# Altium PCB 飞控PCB.PcbDoc
Units mil, origin at the board's own origin, x right, y up, seen from the top; angles counter-clockwise.
Board outline 2440.03 x 1485.03 mil, 2 copper layers (Top Layer, Bottom Layer); 82 components, 56 nets, 290 pads, 107 vias.
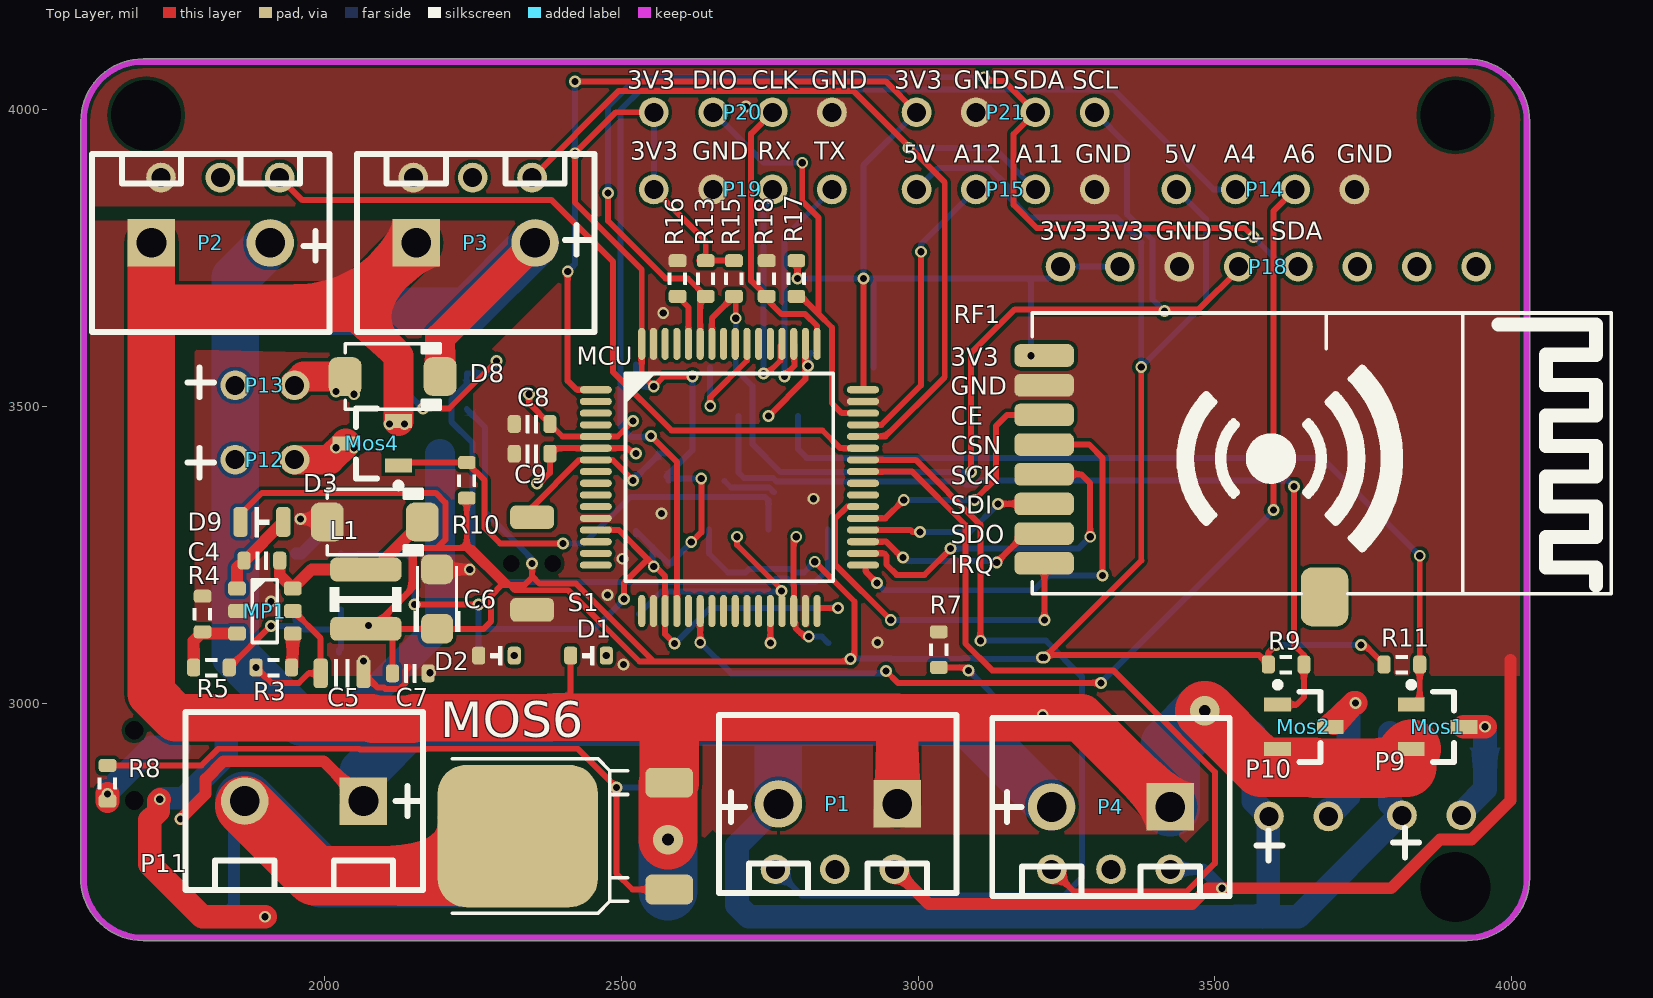
[diagram p0: Top Layer view]
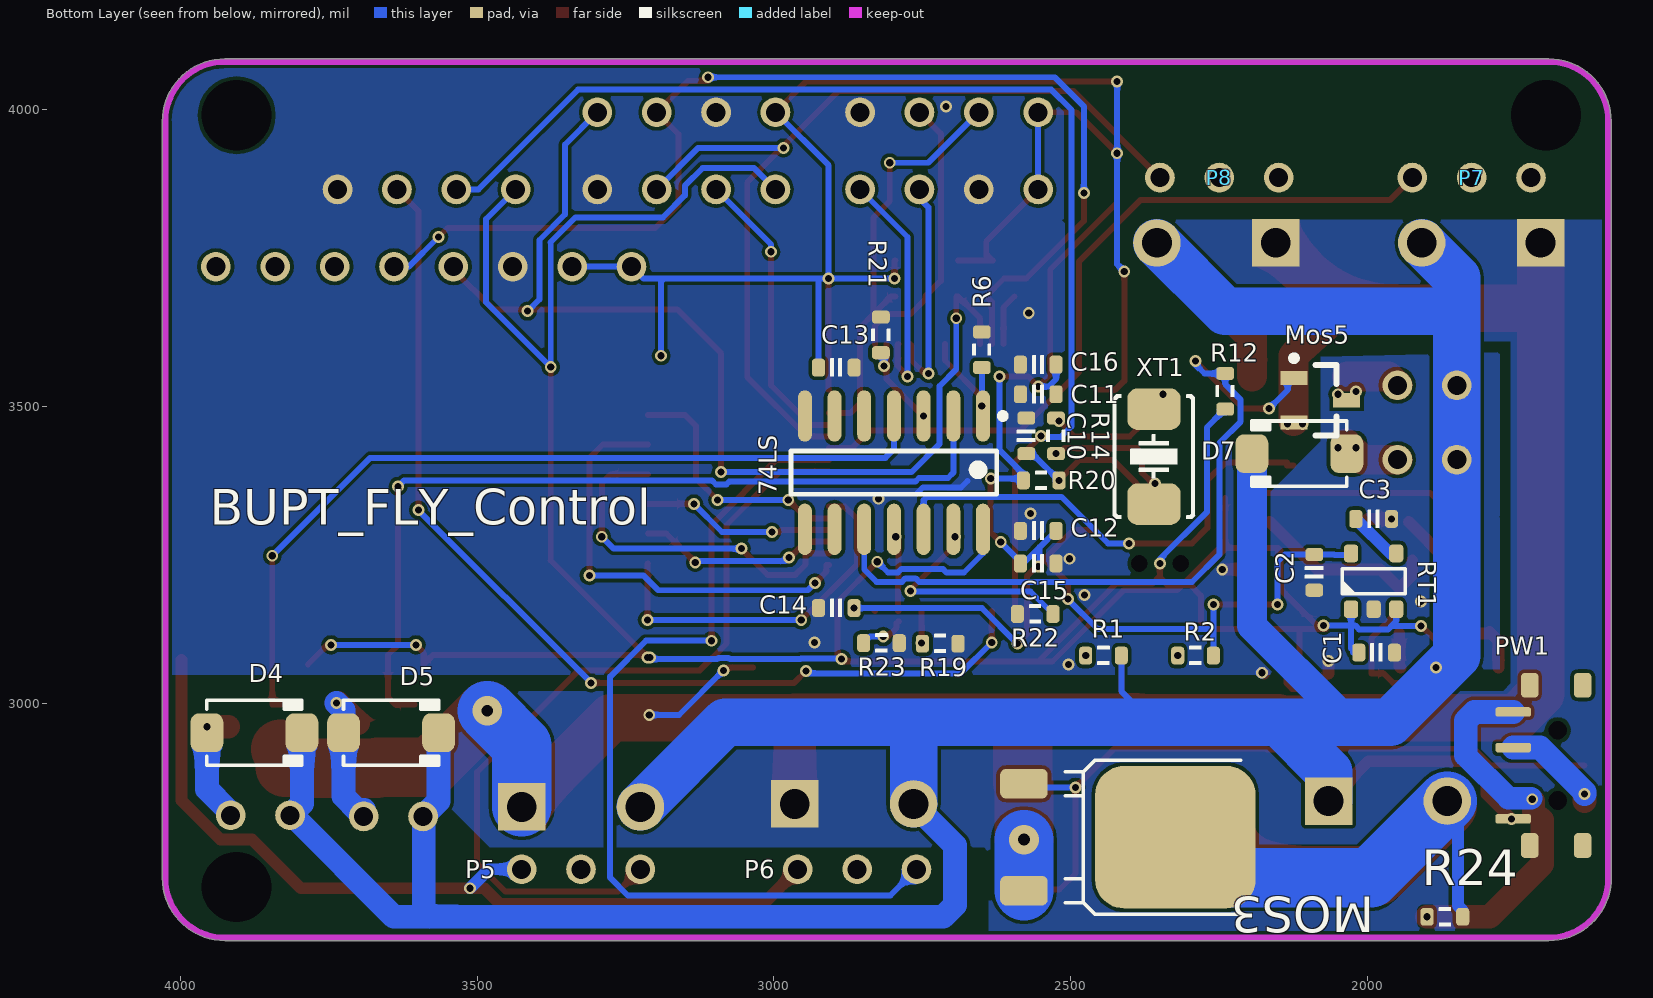
[diagram p1: Bottom Layer view, seen from below]
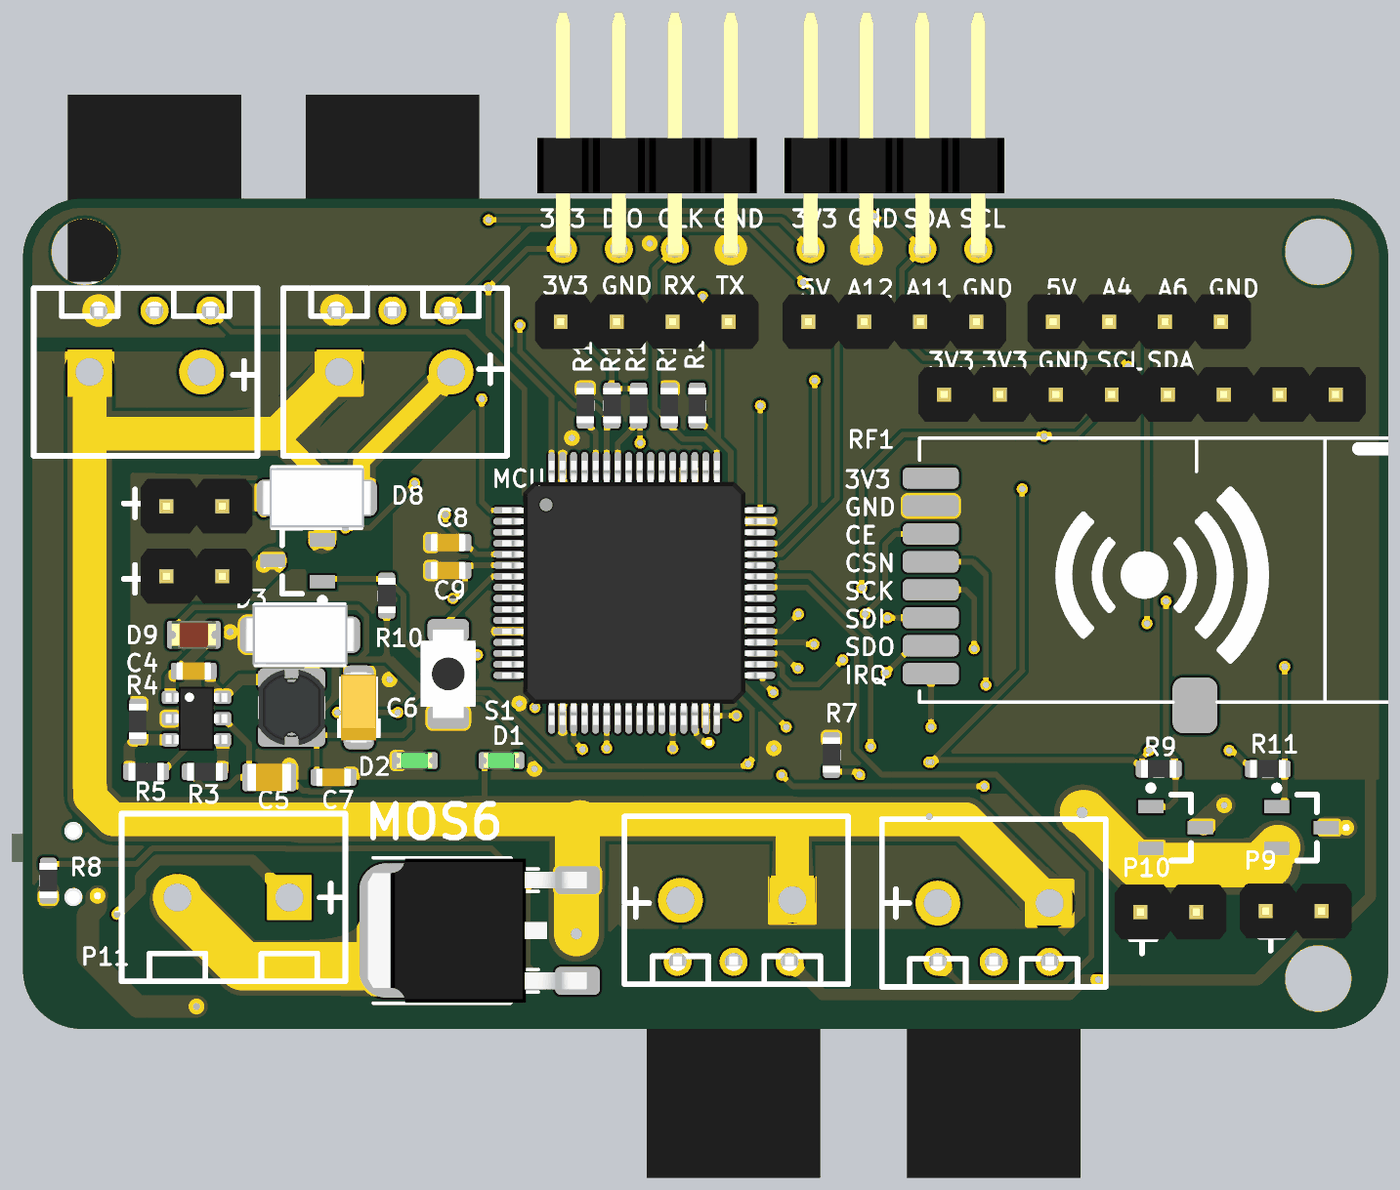
[diagram p2: 3D render of the assembled board from above, using the file's embedded part models]
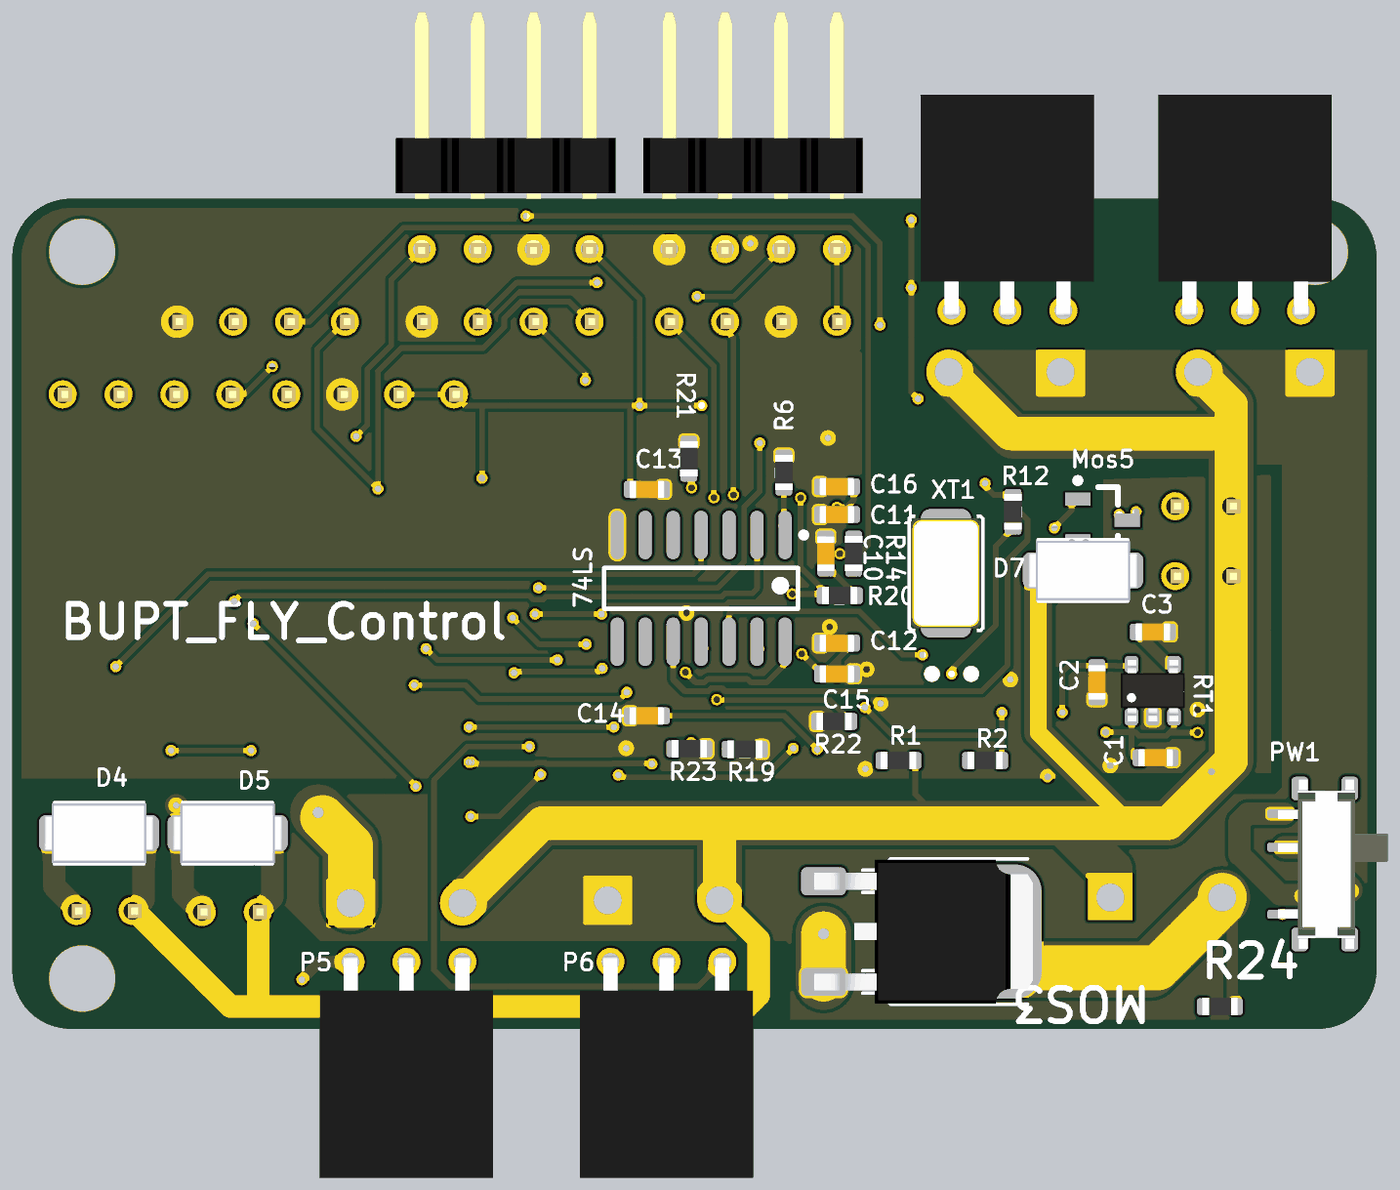
[diagram p3: 3D render of the assembled board from below, using the file's embedded part models]

## Layer stack, top to bottom
Top Solder: solder mask 0.4, Solder Resist, Dk 3.5
Top Layer: signal copper 1.4
Dielectric1: dielectric 12.6, FR-4, Dk 4.8
Bottom Layer: signal copper 1.4
Bottom Solder: solder mask 0.4, Solder Resist, Dk 3.5

## Board outline
1590.18,2698.62 cw(c1595,2700) 1589.98,2700 1589.98,3980 cw(c1695,3980) 1695,4085.01 3925,4085.01 cw(c3925,3980) 4030.01,3980 4030.01,2705 cw(c3925,2705) 3925,2599.99 1695,2599.99 cw(c1695,2705)

## Design rules (kind name [scope] priority, off if disabled: settings)
Clearance [All] p1: gap=6 ignorepadtopadclearanceinfootprint=FALSE except(0: Arc-Hole Track-Hole SMDPad-Hole THPad-Hole Via-Hole Fill-Hole Poly-Hole Region-Hole Text-Hole)
PolygonConnect [All] p1: connectstyle=Direct reliefconductorwidth=10 reliefentries=4 polygonreliefangle="90 Angle" airgapwidth=10
RoutingVias [All] p1: holewidth=12 width=20 viastyle="Through Hole" minholewidth=12 minwidth=20 maxholewidth=100 maxwidth=50
SilkToSilkClearance [All] p1: silktosilkclearance=6
SilkToSolderMaskClearance [IsPad] p1: minsilkscreentomaskgap=6 clearancetoexposedcopper=TRUE
SolderMaskExpansion [All] p1: expansion=4
Width [All] p1: maxlimit=100 minlimit=6 preferedwidth=10 minimp=50.000000 maximp=50.000000 favimp=50.000000
28 further rules are at their usual default settings.

## Classes and differential pairs
component class 飞控: 74LS C8 C9 C10 C11 C12 C13 C14 C15 C16 CC1 MCU MPU1 P14 P15 P18 P19 P20 P21 R6 R9 R10 R11 R12 R13 R14 R15 R16 R17 R18 R19 R20 R21 R22 R23 RF1 S1 XT1
component class 接口: C1 C2 C3 C4 C5 C6 C7 D1 D2 D3 D4 D5 D7 D8 D9 L1 Mos1 Mos2 MOS3 Mos4 Mos5 MOS6 MP1 P1 P2 P3 P4 P5 P6 P7 P8 P9 P10 P12 P13 R1 R2 R3 R4 R5 R7 R8 R24 RT1

## Components (designator, comment, footprint, x,y, rotation, side; value= is the part's Value field where it differs from the comment)
74LS "74LS07" SOP14 2800,3390 r270 bottom
C1 "Cap_0603" CAP_0603 1985,3085 r0 bottom
C2 "Cap_0603" CAP_0603 2090,3220 r90 bottom
C3 "Cap_0603" CAP_0603 1990,3310 r0 bottom
C4 "Cap_0603" CAP_0603 1895,3240 r180 top
C5 "Cap_0805" CAP_0805 2030,3050 r180 top
C6 "Cap_Tan_1206" CAP_TAN_A1206 2190,3175 r90 top
C7 "Cap_0603" CAP_0603 2145,3050 r180 top
C8 "Cap_0603" CAP_0603 2350,3470 r0 top
C9 "Cap_0603" CAP_0603 2350,3420 r0 top
C10 "Cap_0603" CAP_0603 2575,3450 r270 bottom
C11 "Cap_0603" CAP_0603 2555,3520 r180 bottom
C12 "Cap_0603" CAP_0603 2555,3290 r180 bottom
C13 "Cap_0603" CAP_0603 2895,3565 r0 bottom
C14 "Cap_0603" CAP_0603 2895,3160 r180 bottom
C15 "Cap_0603" CAP_0603 2555,3235 r0 bottom
C16 "Cap_0603" CAP_0603 2555,3570 r180 bottom
D1 "LED_0603" LED_0603_GREEN 2445,3080 r180 top
D2 "LED_0603" LED_0603_GREEN 2290,3080 r180 top
D3 "Diode_SMA" DO-214AC 2085,3305 r0 top
D4 "Diode_SMA" DO-214AC 3875,2950 r180 bottom
D5 "Diode_SMA" DO-214AC 3645,2950 r180 bottom
D7 "Diode_SMA" DO-214AC 2115,3420 r0 bottom
D8 "Diode_SMA" DO-214AC 2115,3550 r0 top
D9 "Diode" LED_0805_RED 1895,3305 r0 top
L1 "Ind_CD32" IND_CD32 2070,3175 r270 top
MCU "STM32F103RC" LQFP_P0.5_64 2682.36,3380 r0 top
Mos1 "MOSFET N" Nmos_SOT23 3875,2960 r0 top
Mos2 "MOSFET N" Nmos_SOT23 3650,2960 r0 top
MOS3 "MOSFET_N" TO-252AA 2579,2864 r270 bottom
Mos4 "MOSFET N" Nmos_SOT23 2080.71,3437.4 r180 top
Mos5 "MOSFET N" Nmos_SOT23 2080,3510 r180 bottom
MOS6 "MOSFET_N" TO-252AA 2581,2686 r90 top
MP1 "MP2359" SOT23-6 1900,3155 r0 top
P1 "HDR1x2_2.54" "Green_Header 2" 2964,2830 r0 top
P2 "HDR1x2_2.54" "Green_Header 2" 1710,3775 r180 top
P3 "HDR1x2_2.54" "Green_Header 2" 2156,3775 r180 top
P4 "HDR1x2_2.54" "Green_Header 2" 3424,2825 r0 top
P5 "HDR1x3_2.54" HDR1X3_2.54_90F 3225,2720 r270 bottom
P6 "HDR1x3_2.54" HDR1X3_2.54_90F 2760,2720 r270 bottom
P7 "HDR1x3_2.54" HDR1X3_2.54_90F 1925,3885 r90 bottom
P8 "HDR1x3_2.54" HDR1X3_2.54_90F 2350,3885 r90 bottom
P9 "HDR1x2_2.54" HDR1X2_2.54_180 3815,2811 r90 top
P10 "HDR1x2_2.54" HDR1X2_2.54_180 3591,2809 r90 top
P11 "HDR1x2_2.54" "Green_Header 2" 2065,2835 r0 top
P12 "HDR1x2_2.54" HDR1X2_2.54_180 1850,3410 r90 top
P13 "HDR1x2_2.54" HDR1X2_2.54_180 1850,3535 r90 top
P14 "HDR1x4_2.54" HDR1x4_2.54_180 3435,3865 r90 top
P15 "HDR1x4_2.54" HDR1x4_2.54_180 2997.5,3865 r90 top
P18 "HDR1x8_2.54" HDR1X8_2.54_180 3240,3735 r90 top
P19 "HDR1x4_2.54" HDR1x4_2.54_180 2555,3865 r90 top
P20 "HDR1x4_2.54" HDR1X4_2.54_90 2555,3995 r90 top
P21 "HDR1x4_2.54" HDR1X4_2.54_90 2997.5,3995 r90 top
PW1 "SwitchSPDT_2.8x6.6_90" SwitchSPDT_2.8X6.6_90 1680,2895 r90 bottom
R1 "Res_0603" RES_0603 2445,3080 r0 bottom
R2 "Res_0603" RES_0603 2290,3080 r0 bottom
R3 "Res_0603" RES_0603 1915,3060 r180 top
R4 "Res_0603" RES_0603 1795,3150 r270 top
R5 "Res_0603" RES_0603 1810,3060 r0 top
R6 "Res_0603" RES_0603 2650,3595 r90 bottom
R7 "Res_0603" RES_0603 3035,3090 r270 top
R8 "Res_0603" RES_0603 1635,2865 r270 top
R9 "Res_0603" RES_0603 3620,3065 r0 top
R10 "Res_0603" RES_0603 2240,3375 r90 top
R11 "Res_0603" RES_0603 3815,3065 r180 top
R12 "Res_0603" RES_0603 2240,3525 r90 bottom
R13 "Res_0603" RES_0603 2642.5,3715 r90 top
R14 "Res_0603" RES_0603 2525,3450 r90 bottom
R15 "Res_0603" RES_0603 2690,3715 r90 top
R16 "Res_0603" RES_0603 2595,3715 r90 top
R17 "Res_0603" RES_0603 2795,3715 r90 top
R18 "Res_0603" RES_0603 2745,3715 r90 top
R19 "Res_0603" RES_0603 2720,3100 r180 bottom
R20 "Res_0603" RES_0603 2550,3375 r180 bottom
R21 "Res_0603" RES_0603 2820,3620 r270 bottom
R22 "Res_0603" RES_0603 2560,3150 r180 bottom
R23 "Res_0603" RES_0603 2819,3101 r0 bottom
R24 "Res_0603" RES_0603 1870,2640 r180 bottom
RF1 "NRF2401_优信" nrf24l01_youxin 3590,3405 r0 top
RT1 "RT9193" SOT23-5 1990,3205 r90 bottom
S1 "ButtonTACT_3x4x2_180" ButtonTACT_3x4x2_180H 2350,3235 r270 top
XT1 "XTAL_5032_2P" XT_5032_2 2360,3415 r90 bottom

## Footprints (in the part's own frame and the unit in brackets; to place one, negate y for a bottom-side part, rotate by r counter-clockwise, add the part's x,y. Pads: shape width x height; smd on the part's side, far side on the other; paste and mask are expansions set on the pad)
ButtonTACT_3x4x2_180H [mil]
  round 0 hole 28: 0(0,35) 0(0,-35)
  rrect50% 40x74 smd: 1(-78,0) 2(78,0)
  body extent -79,-49 79,49, height 63
CAP_0603 [mil]
  rrect50% 22x30 smd: 1(-30,0) 2(30,0)
  silkscreen extent -10,-15 10,15, body extent -31,-16 31,16, height 31
CAP_0805 [mil]
  rrect50% 24x50 smd: 1(-36,0) 2(36,0)
  silkscreen extent -12,-24 12,24, body extent -39,-25 39,25, height 39
CAP_TAN_A1206 [mil]
  rrect50% 50x54 smd: 1(-50,0) 2(50,0)
  silkscreen extent -55,-39 55,39, body extent -63,-31 63,32, height 71
DO-214AC [mil] "SMA"
  rrect50% 55x65 smd: 1(-80,0) 2(80,0)
  silkscreen extent -80,-55 80,55, body extent -98,-53 98,53, height 85
"Green_Header 2" [mil]
  rect 80x80 hole 50: 1(1,0)
  round 80 hole 50: 2(-199,0)
  silkscreen extent -299,-150 101,150
HDR1X2_2.54_180 [mil]
  round 50 hole 32: 1(0,0) 2(0,-100)
  body extent -49,-150 49,50, height 323
HDR1X3_2.54_90F [mil]
  round 50 hole 32: 1(0,0) 2(0,-100) 3(0,-200)
  body extent -10,-255 386,55, height 99
HDR1X4_2.54_90 [mil]
  round 50 hole 32: 1(0,0) 2(0,-100) 3(0,-200) 4(0,-300)
  body extent -15,-346 424,46, height 99
HDR1x4_2.54_180 [mil]
  round 50 hole 32: 1(0,0) 2(0,-100) 3(0,-200) 4(0,-300)
  body extent -49,-350 49,50, height 323
HDR1X8_2.54_180 [mil]
  round 50 hole 32: 1(0,0) 2(0,-100) 3(0,-200) 4(0,-300) 5(0,-400) 6(0,-500) 7(0,-600) 8(0,-700)
  body extent -49,-750 49,50, height 323
IND_CD32 [mil]
  rrect50% 40x120 smd: 1(-50,0) 2(50,0)
  silkscreen extent -20,-60 20,60, body extent -68,-59 68,59, height 83
LED_0603_GREEN [mil]
  rrect50% 22x30 smd: 1(-30,0) 2(30,0)
  silkscreen extent -10,-16 10,16, body extent -32,-16 32,16, height 24
LED_0805_RED [mil]
  rrect50% 24x50 smd: 1(-36,0) 2(36,0)
  silkscreen extent -12,-24 12,24, body extent -40,-25 40,25, height 43
LQFP_P0.5_64 [mil]
  oval 54x12 smd: 1(-225,147.64) 2(-225,127.95) 3(-225,108.27) 4(-225,88.58) 5(-225,68.9) 6(-225,49.21) 7(-225,29.53) 8(-225,9.84) 9(-225,-9.84) 10(-225,-29.53) 11(-225,-49.21) 12(-225,-68.9) 13(-225,-88.58) 14(-225,-108.27) 15(-225,-127.95) 16(-225,-147.64) 33(225,-147.64) 34(225,-127.95) 35(225,-108.27) 36(225,-88.58) 37(225,-68.9) 38(225,-49.21) 39(225,-29.53) 40(225,-9.84) 41(225,9.84) 42(225,29.53) 43(225,49.21) 44(225,68.9) 45(225,88.58) 46(225,108.27) 47(225,127.95) 48(225,147.64)
  oval 12x54 smd: 17(-147.64,-225) 18(-127.95,-225) 19(-108.27,-225) 20(-88.58,-225) 21(-68.9,-225) 22(-49.21,-225) 23(-29.53,-225) 24(-9.84,-225) 25(9.84,-225) 26(29.53,-225) 27(49.21,-225) 28(68.9,-225) 29(88.58,-225) 30(108.27,-225) 31(127.95,-225) 32(147.64,-225) 49(147.64,225) 50(127.95,225) 51(108.27,225) 52(88.58,225) 53(68.9,225) 54(49.21,225) 55(29.53,225) 56(9.84,225) 57(-9.84,225) 58(-29.53,225) 59(-49.21,225) 60(-68.9,225) 61(-88.58,225) 62(-108.27,225) 63(-127.95,225) 64(-147.64,225)
  silkscreen extent -175,-175 175,175, body extent -236,-236 236,236, height 59
Nmos_SOT23 [mm]
  rect 1.15x0.6 smd: D(1.125,0) G(-1.125,0.95) S(-1.125,-0.95)
  silkscreen extent -1.25,-1.5 0.7,1.92, body extent -0.7,-1.5 0.7,1.5, height 1.14
nrf24l01_youxin [mil]
  rrect50% 100x38 smd: 1(-377.57,180.39) 2(-377.57,130.39) 3(-377.57,80.39) 4(-377.57,30.39) 5(-377.57,-19.61) 6(-377.57,-69.61) 7(-377.57,-119.61) 8(-377.57,-169.61)
  rrect50% 80x100 smd: 9(94.68,-226.31)
  silkscreen extent -398,-221 577,252
RES_0603 [mil]
  rrect50% 22x30 smd: 1(-30,0) 2(30,0)
  silkscreen extent -10,-16 10,16, body extent -31,-16 31,16, height 18
SOP14 [mm]
  oval 2.2x0.6 smd: 1(-2.374,3.861) 2(-2.374,2.591) 3(-2.374,1.321) 4(-2.374,0.051) 5(-2.374,-1.219) 6(-2.374,-2.489) 7(-2.374,-3.759) 8(2.476,-3.759) 9(2.476,-2.489) 10(2.476,-1.219) 11(2.476,0.051) 12(2.476,1.321) 13(2.476,2.591) 14(2.476,3.861)
  silkscreen extent -2.5,-4.35 0.98,4.84, body extent -1.95,-4.35 2.05,4.45, height 1.7
SOT23-5 [mil]
  rrect50% 30x24 smd: 1(-47,38) 2(-47,0) 3(-47,-38) 4(47,-38) 5(47,38)
  silkscreen extent -21,-53 21,53, body extent -55,-57 55,57, height 57
SOT23-6 [mil]
  rrect50% 30x24 smd: 1(-47,38) 2(-47,0) 3(-47,-38) 4(47,-38) 5(47,0) 6(47,38)
  silkscreen extent -21,-53 21,53, body extent -55,-57 55,57, height 57
SwitchSPDT_2.8X6.6_90 [mil]
  rrect50% 42x30 smd: 0(-135,-42) 0(-135,47) 0(135,-42) 0(135,47)
  round 10 hole 31.5: 0(-59.06,0) 0(59.06,0)
  rrect50% 16x60 smd: 1(90,75) 2(30,75) 3(-90,75)
  body extent -152,-111 151,86, height 55
TO-252AA [mil]
  rrect40% 50x80 smd: 1(0,0) 3(180,0)
  rrect40% 240x270 smd: 4(90,255)
  silkscreen extent -40,70 220,365, body extent -39,-17 219,374, height 91
XT_5032_2 [mil]
  rrect50% 70x90 smd: 1(-80,0) 2(80,0)
  silkscreen extent -104,-68 104,68, body extent -98,-63 98,63, height 39

## Part data
C1 C2 C3 C4 C5 C6 C7 C8 C9 C10 C11 C12 C13 C14 C15 C16: "Capacitor"
D1 D2: "LED"
D3 D4 D5 D7 D8: "Diode"
L1: "Inductor"
MCU: "MCU"
Mos1 Mos2 Mos4 Mos5: "MOS SOT23"
MOS3 MOS6: "MOSFET"
P1 P2 P3 P4 P5 P6 P7 P8 P11 P14 P15 P18 P19 P20 P21: "Header"
P9 P10 P12 P13: library part HDR1x2_2.54T, "Header"
PW1: "Switch"
R1 R2 R3 R4 R5 R6 R7 R8 R9 R10 R11 R12 R13 R14 R15 R16 R17 R18 R19 R20 R21 R22 R23 R24: "Resistor"
RT1: "Power"
S1: "Button"
XT1: "Crystal Oscillator"

## Free pads (board coordinates)
  round 30 hole 118.11: 3(1700,3990) 3(3905,2690) 3(3905,3990)

## Via types
v1: diameter 20, hole 12, Top Layer to Bottom Layer, 105 vias
v2: diameter 50, hole 20, Top Layer to Bottom Layer, 2 vias

## Nets (pads, with @x,y where several pads share a name; then routed paths per layer and width w, separated by ;. In a path a pad name is that pad's centre, name@x,y a point inside that pad or via, vN(x,y) a via of type N, cw(c..) or ccw(c..) an arc to the next point about the centre after c; other vN are vias at no path point)
3V3: C2.2 C11.2 C12.2 C13.2 C14.2 C15.2 C16.2 MCU.1 MCU.13 MCU.19 MCU.32 MCU.48 MCU.64 P18.1 P18.2 P19.1 P20.1 P21.1 R2.1 R13.2 R15.2 R17.2 R20.1 RF1.1 RT1.5 | length 5492.6
  Top Layer w10: v1(2152,3166) v1(2260,3166) ; v1(2410,3727) 2410,3542.64 2425,3527.64 MCU.1 ; v1(2422,4047) 2945.5,4047 P21.1 ; MCU.13 2496,3291.42 2545,3242.42 ; v1(2505,3175) 2505,3202.42 2545,3242.42 ; P20.1 2491,3995 v1(2422,3926) 2422,3843 2534.72,3730.28 MCU.64 2534.72,3553.28 v1(2555,3533) 2572,3550 v1(2620,3550) ; P19.1@2569,3851 2642.5,3777.5 2642.5,3751 2639.75,3753.75 2631,3745 R13.2 R15.2 ; v1(2590,3100) 2574.09,3115.91 MCU.19 2574.09,3213.32 2545,3242.42 ; v1(2618,3271) 2618.5,3271 2635,3287.5 v1(2635,3378) ; R17.2 2797,3745 v1(2797,3715) ; MCU.32 2835,3160 v1(2865,3160) ; MCU.48 2908,3527.64 v1(2908,3715)
  Bottom Layer w10: RT1.5 2028,3249 2056,3249 2057,3250 C2.2 2139.5,3250 2152,3237.5 v1(2152,3166) ; R2.1 2260,3112.5 ; v1(2260,3166) 2260,3125 ; 2260.5,3112 2260,3112.5 ; v1(2410,3727) 2422,3739 v1(2422,3926) v1(2422,4047) ; v1(2505,3175) 2455,3125 2260,3125 ; C12.2@2525,3284 C12.2 2552.5,3262.5 ; C16.2 2525,3545.5 2537.5,3533 v1(2555,3533) ; v1(2555,3230) 2552.5,3232.5 2552.5,3262.5 ; P19.1 P20.1 ; R20.1@2576.25,3381.75 2620,3425.5 v1(2620,3550) ; R20.1 2580,3378 v1(2635,3378) ; v1(2590,3100) 2650,3160 v1(2865,3160) ; v1(2618,3271) 2585,3238 C15.2 2580,3235 2552.5,3262.5 ; v1(2797,3715) v1(2908,3715) ; C13.2 2925,3715 ; P21.1 2908,3905.5 v1(2908,3715) ; v1(3190,3585) 3190,3710 3185,3715 ; P18.2 P18.1 3220,3715 3185,3715 ; 2260,3112.5 2260,3125 ; v1(2908,3715) 2925,3715 ; 2925,3715 3185,3715
5V: 74LS.14 C1.2 C6.1 C7.2 D9.1 L1.2 P14.1 P15.1 R5.2 R9.1 R10.1 R11.2 R12.1 RT1.1 RT1.3 | length 6186.2
  Top Layer w10: R5.2 v1(1910,3130) ; D9.1 1859,3318 1895,3354 2187.5,3354 2204,3337.5 2204,3275 2190.3,3261.3 2151,3261.3 2146.5,3256.8 2146.5,3191.5 ; L1.2 L1.2@2080.5,3125 ; v1(2074.25,3130.75) 2085.75,3130.75 2146.5,3191.5 ; C7.2 L1.2@2115,3125 ; R10.1 2240,3261 ; v1(2350,3235) 2350,3213.5 2351,3212.5 ; v1(2826,3238) 2893,3171 2893,3081 v1(2886,3074) 2882,3070 2555,3070 ; v1(3209,3077) 3213,3081 v1@3217,3081 ; v1(3213,3077) v1@3217,3081 ; v1(3376,3566) 3376,3240.75 3376.37,3240.37 v1@3217,3081 ; v1(3603,3098) 3590,3085 R9.1 3574,3081 v1@3217,3081 ; v1(3746,3098) 3752,3098 R11.2 ; L1.2@2080.5,3125 2146.5,3191 2146.5,3191.5 ; L1.2@2080.5,3125 L1.2@2115,3125 ; L1.2@2115,3125 C6.1 2268.5,3125 2281,3137.5 2281,3181 2299,3199 2301,3199 ; 2146.5,3191.5 2151,3196 2151,3260 2152,3261 2240,3261 ; 2240,3261 2240,3260 2301,3199 ; 2240,3261 2250,3261 2312,3199 ; 2301,3199 2312,3199 ; 2312,3199 2337.5,3199 2351,3212.5 ; 2312,3199 2321,3190 2411,3190 2531,3070 2555,3070 ; 2351,3212.5 2362.5,3201 2424,3201 2555,3070
  Bottom Layer w10: v1(1910,3130) 1959.5,3130 ; RT1.3 1952,3137.5 1959.5,3130 ; C1.2@2025,3085 2025,3089 2028,3092 2028,3130.75 ; RT1.1 2028,3130.75 ; v1(2074.25,3130.75) 2028,3130.75 ; R12.1 2271,3464 2271,3321.5 2350,3242.5 v1(2350,3235) ; 74LS.14 2648,3252 2680,3220 2709.75,3220 2715.75,3226 2785.33,3226 2791.33,3220 2808,3220 v1(2826,3238) v1@2825,3239 ; v1(2886,3074) 2887,3075 2954.7,3075 2955.7,3074 3074.3,3074 3076.3,3076 3093.7,3076 3095.7,3074 3206,3074 v1(3209,3077) v1(3213,3077) ; P15.1 3033.5,3901 3120.5,3901 3150,3871.5 3150,3855 3187,3818 3334.37,3818 3376.37,3776 3376,3775.62 v1(3376,3566) 3485,3675 3485,3815 P14.1 ; v1(3603,3098) v1(3746,3098) ; 1959.5,3130 1965.5,3124 2014.5,3124 2021.25,3130.75 2028,3130.75
BGND: MOS3.4 MOS6.4 P11.2 R24.2 | length 1287.6
  Top Layer w70: P11.2@1866,2827 P11.2 ; MOS6.4@2234,2709 2269,2744 2294,2744 MOS6.4 MOS6.4@2330,2780
  Top Layer w100: P11.2@1866,2827 1984,2709 MOS6.4@2234,2709
  Bottom Layer w20: R24.2@1840,2651 1848,2659 P11.2@1848,2817
  Bottom Layer w70: MOS3.4@2235,2706 2275,2746 2330,2746 MOS3.4@2330,2780
  Bottom Layer w100: P11.2 1995,2706 MOS3.4@2235,2706
BOOT0: MCU.60 R16.1 | length 87.6
  Top Layer w10: R16.1 2613.46,3666.54 MCU.60
BOOT1: MCU.28 R19.1 | length 53.7
  Top Layer w10: v1(2751.26,3101.26) MCU.28
CE: MCU.37 RF1.3 | length 429
  Top Layer w10: MCU.37 2945,3311.1 v1(2975.9,3342) ; v1(3095,3342) 3131,3378 3131,3466.39 3150,3485.39 RF1.3
  Bottom Layer w10: v1(2975.9,3342) v1(3095,3342)
CH1: 74LS.4 Mos1.G R11.1 | length 1442.2
  Top Layer w10: Mos1.G 3845,2997.4 R11.1 v1(3845,3248)
  Bottom Layer w10: 74LS.4 2798,3427.5 2812.5,3413 3680,3413 v1(3845,3248)
CH2: 74LS.2 Mos2.G R9.2 | length 1457.4
  Top Layer w10: Mos2.G 3637.5,2997.4 3650,3009.9 R9.2 3650,3081 3633,3098 v1(3633,3365)
  Bottom Layer w10: 74LS.2 2698,3388 2707,3379 2755.87,3379 2761.87,3373 3075.3,3373 3080.3,3368 3097.7,3368 3104.7,3375 3623,3375 v1(3633,3365)
CH3: 74LS.12 Mos4.G R10.2 | length 814.8
  Top Layer w10: Mos4.G 2136,3400 2136,3405 R10.2 2270,3375 2270,3295 2296,3269 v1(2402,3269)
  Bottom Layer w10: v1(2402,3269) 2437.5,3269 2515.5,3347 2742.62,3347 2748,3341.62 74LS.12
CH4: 74LS.10 Mos5.G R12.2 | length 1323.2
  Top Layer w10: v1(2166,3496) 2210,3496 v1(2290,3576)
  Bottom Layer w10: Mos5.G 2135,3547.4 2135,3527 v1(2166,3496) ; v1(2290,3576) 2290,3570 2275,3555 R12.2 2240,3537 2214,3511 2214,3474 2250,3438 2250,3250 2296,3204 2755.3,3204 2761.3,3210 2778.7,3210 2784.7,3204 2827,3204 2848,3225 74LS.10
CSN: MCU.33 RF1.4 | length 743.8
  Top Layer w10: MCU.33 2912,3232.36 2912,3221 v1(2931,3202) ; RF1.4 3288.11,3435.39 3311,3412.5 v1(3311,3215)
  Bottom Layer w10: v1(2931,3202) 2943,3190 3195,3190 3220,3215 v1(3311,3215)
GND: 74LS.7 C1.1 C2.1 C3.1 C5.1 C6.2 C7.1 C8.1 C9.1 C10.1 C11.1 C12.1 C13.1 C14.1 C15.1 C16.1 D2.2 D3.1 MCU.12 MCU.18 MCU.31 MCU.47 MCU.63 MP1.2 P5.3 P6.3 P7.3 P8.3 P14.4 P15.4 P18.3 P19.2 P20.4 P21.2 R4.1 R6.2 R7.1 R16.2 R18.2 R19.2 R21.1 R22.1 R23.1 RF1.2 RT1.2 S1.2 | length 1805.9
  Top Layer w10: C5.1 2090,3026 2100.67,3026 2102.67,3024 2127.33,3024 2137,3033.67 2137,3055 2143,3061
  Top Layer w20: v1(1960,3310) 2000,3310 D3.1 ; C5.1 v1(2066,3071) ; C7.1 2176,3051 v1(2178,3051) ; C6.2 v1(2245,3225) ; P6.3 3018.5,2661.5 3461.2,2661.5 3487.7,2688 v1(3512,2688) 3796.86,2688 3878.86,2770 3931.98,2770 3998,2836.02 3998,3073
  Bottom Layer w10: 2674,3374 2685,3363 2749.25,3363 2757.25,3355
  Bottom Layer w20: v1(2178,3051) v1@2179,3051 ; P5.3 3480,2720 v1(3512,2688)
  other v1: 2504,3065 2932,3102 1910,3171 2477,3182 2502,3243 2568,3319 2824,3344 2571,3657 2710,4005
IRQ: MCU.38 RF1.8 | length 619.9
  Top Layer w10: MCU.38 2880.79,3330.79 2860,3310 2860,3234 v1(2954,3140) ; RF1.8 3213,3235.39 v1(3213,3140)
  Bottom Layer w10: v1(2954,3140) v1(3213,3140)
MISO: MCU.35 RF1.7 | length 339.9
  Top Layer w10: MCU.35 2946.27,3271.73 2973.5,3244.5 2974,3245 v1(2975,3245) ; v1(3132.61,3237) 3181,3285.39 RF1.7
  Bottom Layer w10: v1(2975,3245) 2981,3239 3130.61,3239 v1(3132.61,3237)
MOSI: MCU.36 RF1.6 | length 326.1
  Top Layer w10: MCU.36 2987.58,3291.42 2991,3288 v1(3003.5,3288) ; v1(3135,3335.39) RF1.6
  Bottom Layer w10: v1(3003.5,3288) 3087.61,3288 v1(3135,3335.39)
NetC3_2: C3.2 RT1.4 | length 92
  Bottom Layer w20: RT1.4 1962,3252 C3.2
NetC4_1: C4.1 D3.2 L1.1 MP1.6 | length 320.5
  Top Layer w20: C4.1 1925,3215 MP1.6 1979,3225 L1.1 2085,3225 D3.2
NetC4_2: C4.2 D9.2 MP1.1 | length 144.9
  Top Layer w20: MP1.1 1853,3228 C4.2 1866,3240 D9.2
NetC8_2: C8.2 MCU.5 R14.2 XT1.2 | length 224.1
  Top Layer w10: v1(2345,3520) 2345,3505 C8.2 2401.1,3448.9 MCU.5 2493.9,3448.9 v1(2520,3475)
NetC9_2: C9.2 MCU.6 R14.1 XT1.1 | length 214.3
  Top Layer w10: v1(2358.13,3370) 2362.5,3370 2380,3387.5 C9.2 2389.21,3429.21 MCU.6 2510.79,3429.21 2520,3420 v1(2525,3420)
NetD1_1: D1.1 R1.2
  other v1: 2475,3080
NetD2_1: D2.1 R2.2
  other v1: 2320,3080
NetD4_1: D4.1 Mos1.D P9.2 | length 180.2
  Top Layer w40: Mos1.D v1(3955,2960)
  Bottom Layer w40: P9.2@3920,2820 3955,2855 D4.1
NetD5_1: D5.1 Mos2.D P10.2 | length 256.8
  Top Layer w40: Mos2.D@3700.65,2966.35 3734.29,3000 v1(3737,3000)
  Bottom Layer w40: P10.2@3690,2820 3702,2820 3725,2843 D5.1 3725,2988 v1(3737,3000)
NetD7_1: D7.1 Mos4.D P12.2 | length 97.8
  Top Layer w50: P12.2 2009.01,3410 Mos4.D
  other v1: 2020,3430 2050,3430
NetD8_1: D8.1 Mos5.D P13.2 | length 91.2
  Top Layer w50: P13.2 1965,3550 D8.1
  other v1: 2050,3520 2020,3525
NetMOS3_1: MOS3.1 MOS6.1 R8.1 | length 1231
  Top Layer w10: R8.1 1793.3,2895 1821.3,2923 2059.42,2923 2060.42,2922 2169.58,2922 2170.58,2923 2427,2923 v1(2492,2858) 2492,2713 2519,2686 MOS6.1
  Bottom Layer w10: v1(2492,2858) 2573,2858 MOS3.1
NetMP1_3: MP1.3 R4.2 R5.1 | length 125.5
  Top Layer w20: R5.1 1780,3105 R4.2 1798,3117 MP1.3
NetMP1_4: MP1.4 R3.1 | length 57.8
  Top Layer w20: R3.1 1947,3062 MP1.4
NetPW1_1: PW1.1 R24.1 | length 630.9
  Top Layer w38: 1706,2802.9 1720.75,2817.65 1720.75,2835.75 v1(1723,2838)
  Top Layer w40: 1706,2802.9 1706,2729 1795,2640 v1(1900,2640)
  Bottom Layer w38: v1@1725,2840 1763,2840 1835,2912
  Bottom Layer w40: PW1.1 1820,2985 1835,2970 1835,2912
NRST: C10.2 MCU.7 R20.2 S1.1 | length 307.9
  Top Layer w10: S1.1 2350,3330 2429.53,3409.53 MCU.7 2485.47,3409.53 v1(2520,3375)
  Bottom Layer w10: v1(2520,3375) 2565,3420 C10.2
PGND: D1.2 Mos1.S Mos2.S MOS3.3 Mos4.S Mos5.S MOS6.3 P1.1 P2.1 P3.1 P4.1 R7.2 | length 4610.4
  Top Layer w10: 2381,2976 2415,3010 D1.2 ; R7.2 3080,3060 v1(3085,3055) v1@3090,3050
  Top Layer w50: 2045,3665 2125,3585 Mos4.S
  Top Layer w70: P1.1 2965,2975 2965,2976
  Top Layer w80: P2.1 1709,3016 1750,2975 2079.54,2975 2081.54,2973 2148.46,2973 2150.46,2975 2380,2975 ; 1728,3665 2045,3665 P3.1 ; 2381,2976 2965,2976 ; 2965,2975 3275,2975 P4.1
  Top Layer w100: v2(2579,2770) 2579,2864 MOS6.3 2581,2963 ; v2(3483,2987) 3483.18,2987 3561,2909.18 3561,2909 3577.81,2892.19 3667.33,2892.19 3669.17,2890.35 3779.8,2890.35 3781.45,2892 3823,2892 3823,2914.89 Mos1.S
  Bottom Layer w10: v1(3085,3055) 3160,2980 v1(3210,2980)
  Bottom Layer w100: MOS3.3 v2(2579,2770) ; P4.1 3425,2929 v2(3483,2987)
  other v1: 2110,3470 2135,3470
RXD: MCU.52 P19.3 | length 388.9
  Top Layer w10: v1(2740,3555) 2746.3,3555 2768.26,3576.96 2768.26,3602.31 MCU.52
  Bottom Layer w10: v1(2740,3555) 2740,3835 2762.5,3857.5 P19.3
SCL: MCU.58 P18.4 P21.4 R15.1 | length 1844.2
  Top Layer w10: MCU.58 2652.83,3647.83 R15.1 2693,3685 v1(2693,3648) ; v1(3089,3389) 3089,3589 3163,3663 3473,3663 3540,3730 P18.4
  Bottom Layer w10: v1(2693,3648) 2693,3562 2721,3534 2721,3436.5 2768.5,3389 v1(3089,3389) ; P21.4 3352,3940.5 3352,3823 3395,3780 3395,3680 v1(3415,3660)
SCLK: MCU.34 RF1.5 | length 607
  Top Layer w10: MCU.34 2942.95,3252.05 2947,3248 2947,3233 2964,3216 3011,3216 v1(3055,3260) ; RF1.5 3275,3385.39 3290,3370.39 v1(3290,3280)
  Bottom Layer w10: v1(3055,3260) 3270,3260 v1(3290,3280)
SDA: MCU.59 P18.5 P21.3 R13.1 | length 1954.9
  Top Layer w10: v1(2478,3859) 2478,3812 2575,3715 2612.5,3715 R13.1 2633.15,3675.65 MCU.59 ; v1(3111,4054) 3111,4048 3144.5,4048 P21.3 3161,3958.5 3161,3839 3200,3800 3550,3800 v1(3565,3785)
  Bottom Layer w10: v1(2478,3859) 2478,4005 2527,4054 v1(3111,4054) ; v1(3565,3785) 3615,3735 P18.5
SWCLK: MCU.49 P20.3 R18.1 | length 474.3
  Top Layer w10: P20.3 2719,3959 2719,3711 R18.1 2745,3680 2770,3655 2810,3655 2830,3635 MCU.49
SWDIO: MCU.46 P20.2 R17.1 | length 720.3
  Top Layer w10: R17.1 2802.63,3685 2832.63,3655 ; v1(2805,3910) 2805,3845 2832.63,3817.37 2832.63,3655 ; MCU.46 2871.73,3488.27 2855,3505 2855,3632.63 2832.63,3655
  Bottom Layer w10: P20.2 2740,3910 v1(2805,3910)
TIM1_CH1: MCU.41 P5.1 | length 1383.6
  Top Layer w10: MCU.41 2990.16,3389.84 3080,3300 3080,3100 3125,3055 3328.91,3055 3422,2961.91 3422,2961.73 3457.73,2926 3457.91,2926 3500,2883.91 3500,2730 3452.5,2682.5 3262.5,2682.5 P5.1
TIM1_CH2: MCU.42 P6.1 | length 1523.5
  Top Layer w10: MCU.42 2996,3409.53 3105,3300.53 v1(3105,3105)
  Bottom Layer w10: P6.1 2804,2676 3246,2676 3276,2706 3276,3044.5 3215.5,3105 v1(3105,3105) v1@3105,3101
TIM1_CH3: MCU.43 P7.1 | length 1280.1
  Top Layer w10: P7.1 1963,3847 2383,3847 2486,3744 2486,3558 2585,3459 2839.21,3459 2869,3429.21 MCU.43
TIM1_CH4: MCU.44 P8.1 P15.3 | length 1590.3
  Top Layer w10: P8.1 2496,4031 2891,4031 3045,3877 3045,3548.9 2945,3448.9 2944.9,3448.9 ; MCU.44 2944.9,3448.9 ; 2960,3464 2944.9,3448.9
  Bottom Layer w10: v1(2984,3935) 3127.5,3935 P15.3
TIM2_CH1: 74LS.3 MCU.50 R21.2 | length 174
  Top Layer w10: v1(2748,3483.47) 2750,3485 2810.32,3545.32 MCU.50 ; v1@2814,3566 2814,3566.86 v1(2815.01,3567.87)
  Bottom Layer w10: v1(2815.01,3567.87) 2815.01,3585.01 R21.2
TIM2_CH2: 74LS.1 MCU.55 R6.1 | length 195.6
  Top Layer w10: v1(2650,3500) 2650,3515 2711.89,3576.89 MCU.55
  Bottom Layer w10: v1(2650,3500) R6.1
TIM2_CH3: 74LS.13 MCU.29 R22.2 | length 379
  Top Layer w10: v1(2695,3280) 2695,3266.26 2770.94,3190.32 2770.94,3189.94 v1(2770,3189)
  Bottom Layer w10: R22.2 2568,3188 2769,3188 v1(2770,3189)
TIM2_CH4: 74LS.11 MCU.30 R23.2 | length 206.6
  Top Layer w10: MCU.30@2789,3137 2791,3137 2793.31,3134.69 2793.31,3126.96 2808.27,3112 v1(2816,3112) ; MCU.30 2791,3155.37 2791,3197.7 2790.63,3198.07 2790.63,3275.63 v1(2795,3280)
  Bottom Layer w10: v1(2816,3112) 2838,3112 R23.2
TIM3_CH1: MCU.22 P14.3 | length 1725.8
  Top Layer w10: v1(2633.15,3102) MCU.22 ; v1(2946,3054) 2966,3034 v1(3308,3034) ; v1(3599,3325) 3599,3829 P14.3
  Bottom Layer w10: v1(2633.15,3102) 2685.15,3050 2942,3050 v1(2946,3054) ; v1(3308,3034) v1(3599,3325)
TIM5_CH1: MCU.14
TIM5_CH2: MCU.15
TIM5_CH3: MCU.16
TIM5_CH4: MCU.17
TRIG1: MCU.20 P14.2 | length 2025.1
  Top Layer w10: v1(2550,3450) 2593.78,3406.22 MCU.20
  Bottom Layer w10: v1(2550,3450) 2548,3448 2517,3448 2499,3466 2499,3999 2533,4033 3330,4033 3498,3865 P14.2
TRIG2: MCU.45 P15.2 | length 498.5
  Top Layer w10: MCU.45 2938.58,3468.58 3005,3535 v1(3005,3760) v1@3005,3765
  Bottom Layer w10: v1(3005,3760) 3005,3772.5 P15.2
TXD: MCU.51 P19.4 | length 410.7
  Top Layer w10: v1(2775,3550) 2775,3551.11 2791.94,3568.06 2791.94,3603.69 MCU.51
  Bottom Layer w10: v1(2775,3550) 2775,3785 P19.4
VBAT: C5.2 D4.2 D5.2 D7.2 D8.2 MP1.5 P1.2 P2.2 P3.2 P4.2 P9.1 P10.1 P11.1 P12.1 P13.1 PW1.3 R1.1 R3.2 | length 6467.4
  Top Layer w10: v1(1885,3060) 1911,3034 1957.33,3034 1973.33,3050 C5.2 1994,3109.04 1948.04,3155 MP1.5
  Top Layer w20: v1(1758,2805) 1800,2847 1800,2872 1830,2902 1999,2902 P11.1
  Top Layer w50: D8.2 2195,3615 P3.2
  Bottom Layer w10: PW1.3 v1(1758,2805) ; 1880,3050 1885,3055 v1(1885,3060) ; 2390,2995 2415,3020 R1.1
  Bottom Layer w40: P1.2 2695,2760 2695,2660 2715,2640 3580,2640 ; D5.2 3565,2835 3590,2810 3590,2650 3580,2640 ; D4.2 3795,2831 3813,2813 3640,2640 3580,2640
  Bottom Layer w50: 2047,2982 2195,3130 D7.2
  Bottom Layer w80: P2.2 1850,3716 1850,3660 ; P11.1 2066,2884 2150,2968 ; P3.2 2240,3660 1850,3660 ; P1.2 2765,2968 ; P4.2 3082,2968 2765,2968 ; 1850,3660 P13.1 P12.1 1850,3080 1880,3050 1962,2968 2150,2968 ; 2150,2968 2765,2968
VIN: PW1.2 R8.2 | length 166.1
  Top Layer w40: R8.2 v1(1635,2846.75)
  Bottom Layer w40: v1(1635,2846.75) 1635,2849.98 1710.02,2925 PW1.2
pads on no net: 74LS.5 74LS.6 74LS.8 74LS.9 MCU.2 MCU.3 MCU.4 MCU.8 MCU.9 MCU.10 MCU.11 MCU.21 MCU.23 MCU.24 MCU.25 MCU.26 MCU.27 MCU.39 MCU.40 MCU.53 MCU.54 MCU.56 MCU.57 MCU.61 MCU.62 P5.2 P6.2 P7.2 P8.2 P18.6 P18.7 P18.8 PW1.0 RF1.9 S1.0

## Polygon pours and split planes (outlines as drawn)
GND on Bottom Layer "Bottom Layer-No Net" (solid, remove dead copper, pour order 4): 2079,3441 2080,3440 2278,3440 2278,3576 2515,3813 2512,3816 2512,4292 4158,4292 4437,4013 4454,3996 4454,3048 2112,3048 1997,3163
GND on Bottom Layer "Bottom Layer-No Net" (solid, pour order 0): 1778,3591 1778,3053 1778,3312 2057,3591 1778,3312 1778,3057 2417,3057 2440,3080 2079,3441 2079,3583
PGND on Bottom Layer "Bottom Layer-No Net" (solid, remove dead copper, pour order 14): 3868,3028 3894,3002 3894,2832 3554,2832 3490,2768 3479,2757 2731,2757 2646,2757 2638,2749 2638,2543 1639,2543 1561,2621 1511,2671 1511,3814 2385,3814 2401,3798 2397,3750 2393,3743 2256,3606 2253,3609 1759,3609 1759,3033 1770,3022 1772,3020 3849,3020
GND on Top Layer "Bottom Layer-No Net" (solid, remove dead copper, pour order 8): 2460,3837 1567,3837 1530,3874 1561,3905 1561,4115 1733,4115 1783,4165 1825,4123 2713,4123
GND on Top Layer "Bottom Layer-No Net" (solid, remove dead copper, pour order 6): 1782,3595 1782,3046 4326,3046 4390,3110 4284,3216 4284,4189 2496,4189 2488,4181 2424,4117 2424,3737 2423,3737 2267,3581 2251,3565 2251,3422 2069,3422 2061,3430 2042,3449 2042,3589
PGND on Top Layer "Bottom Layer-No Net" (solid, remove dead copper, pour order 10): 3877,3024 3862,3009 3862,2802 3488,2802 3451,2765 3437,2779 2908,2779 2662,2779 2654,2787 2638,2771 2638,2644 1987,2644 1898,2555 1889,2546 1352,2546 1352,3636 1536,3820 1544,3812 2364,3812 2373,3812 2403,3782 2407,3778 2407,3745 2402,3745 2282,3625 2271,3614 1763,3614 1763,3031 1776,3018 1779,3021 3389,3021 3867,3021 3871,3025

## Keep-outs
Keep-Out Layer:
  lines w10: 1595,2700 1595,3980 cw(c1695,3980) 1695,4080 3925,4080 cw(c3925,3980) 4025,3980 4025,2705 cw(c3925,2705) 3925,2605 1695,2605 cw(c1695,2705) 1595,2705

## Silkscreen, mask and mechanical layers (free items; w line width, h text height)
Top Overlay:
  lines w10: 1770,3405 1814,3405 ; 1770,3540 1814,3540 ; 1790,3380 1790,3430 ; 1790,3515 1790,3565 ; 1965,3770 2009,3770 ; 1985,3745 1985,3795 ; 2120,2835 2164,2835 ; 2140,2810 2140,2860 ; 2405,3780 2449,3780 ; 2425,3755 2425,3805 ; 2665,2825 2709,2825 ; 2685,2800 2685,2850 ; 3130,2825 3174,2825 ; 3150,2800 3150,2850 ; 3570,2760 3614,2760 ; 3590,2735 3590,2785 ; 3800,2765 3844,2765 ; 3820,2740 3820,2790
  text "3V3" at 2510,4035 h30
  text "DIO" at 2620,4035 h30
  text "CLK" at 2720,4035 h30
  text "GND" at 2820,4035 h30
  text "3V3" at 2960,4035 h30
  text "GND" at 3060,4035 h30
  text "SDA" at 3160,4035 h30
  text "SCL" at 3260,4035 h30
  text "3V3" at 2515,3915 h30
  text "GND" at 2620,3915 h30
  text "RX" at 2730,3915 h30
  text "TX" at 2825,3915 h30
  text "5V" at 2975,3910 h30
  text "A12" at 3060,3910 h30
  text "A11" at 3165,3910 h30
  text "GND" at 3265,3910 h30
  text "5V" at 3415,3910 h30
  text "A4" at 3515,3910 h30
  text "A6" at 3615,3910 h30
  text "GND" at 3705,3910 h30
  text "3V3" at 3205,3780 h30
  text "3V3" at 3300,3780 h30
  text "GND" at 3400,3780 h30
  text "SCL" at 3505,3780 h30
  text "SDA" at 3595,3780 h30
Bottom Overlay:
  text "BUPT_FLY_Control" at 3950,3300 h60
Top Solder:
  lines w30: 2045,3665 2125,3585 2125,3480 ; 2195,3560 2195,3615 2355,3775
  lines w60: 1709,3775 1709,3034 1710,3033 1710,3015 1750,2975 3275,2975 3425,2825 ; 1720,3665 2045,3665 2155,3775 ; 1866,2834 1866,2835 ; 2965,2830 2965,2970
  lines w80: 1866,2834 1985,2715 2242,2715 2243,2714 ; 1866,2835 1866,2824 1981,2709 2231,2709 2238,2702 ; 2579,2770 2579,2849 2581,2851 2581,2965 2585,2969 ; 3483,2987 3487,2987 3488,2987 3582,2893 3818,2893 ; 3809,2898 3810,2898 3810,2902 3833,2925
Bottom Solder:
  lines w30: 2045,2980 2195,3130 2195,3135 2195,3415
  lines w40: 2765,2830 2695,2760 2695,2660 2715,2640 3640,2640 3820,2820 ; 3590,2640 3590,2820
  lines w60: 1865,3665 2245,3665 2355,3775 ; 1909,3775 1850,3716 1850,3080 1962,2968 3082,2968 3225,2825 ; 2765,2830 2765,2960
  lines w80: 1866,2835 1866,2824 1981,2709 2215,2709 ; 2579,2689 2579,2770 ; 3425,2912 3425,2825 3425,2904 3425,2928 3475,2978

## Text inside footprints (layer, text, board x,y; h text height)
RF1: Top Overlay "CE" at 3055.21,3468.83 h30; Top Overlay "3V3" at 3055.21,3568.42 h30; Top Overlay "CSN" at 3055.21,3418.83 h30; Top Overlay "SCK" at 3055.21,3368.83 h30; Top Overlay "SDI" at 3055.21,3318.83 h30; Top Overlay "SDO" at 3055.21,3268.83 h30; Top Overlay "IRQ" at 3055.21,3218.83 h30; Top Overlay "GND" at 3055.21,3518.91 h30